# Altium PCB Final_PCB.PcbDoc
Units mil, origin at the board's own origin, x right, y up, seen from the top; angles counter-clockwise.
Board outline 4345 x 3360 mil, 2 copper layers (Top Layer, Bottom Layer); 17 components, 14 nets, 81 pads, 0 vias.
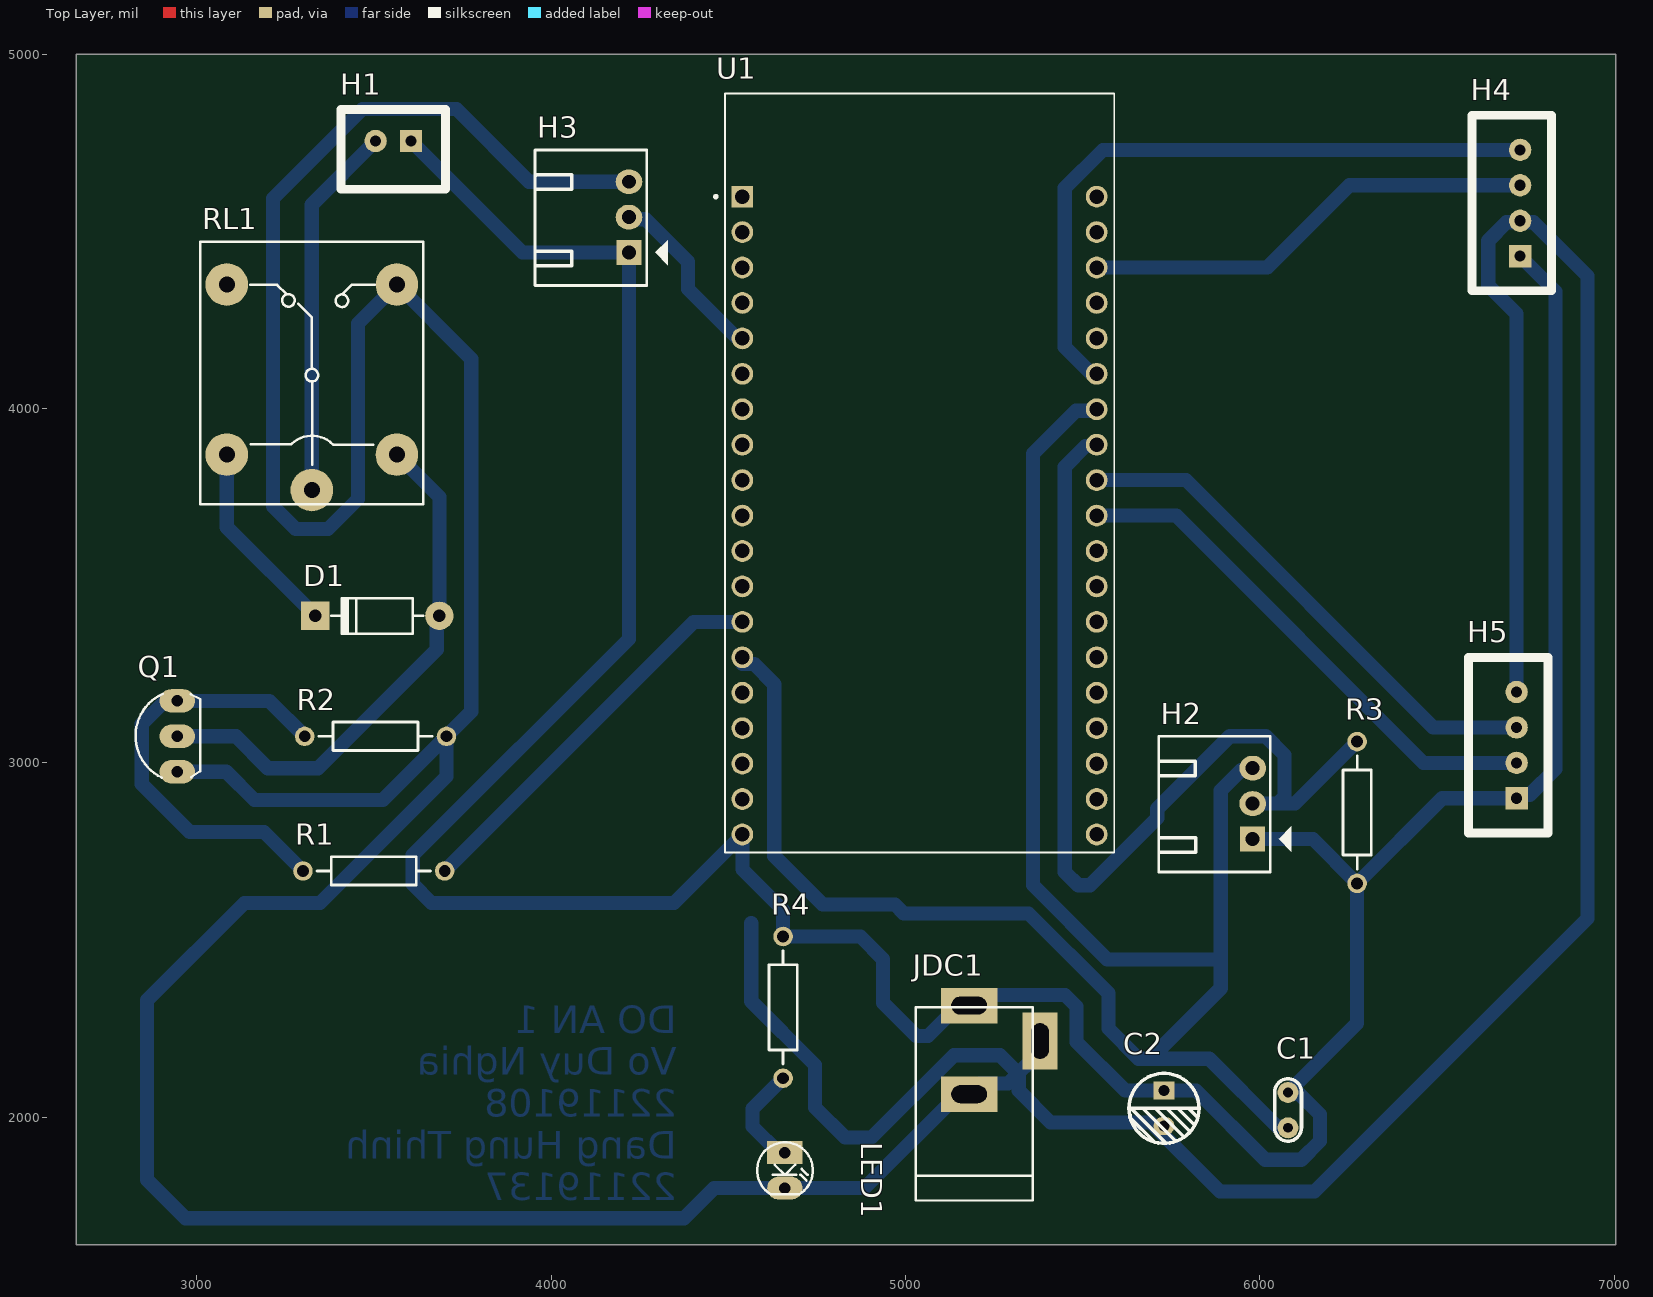
[diagram p0: Top Layer view]
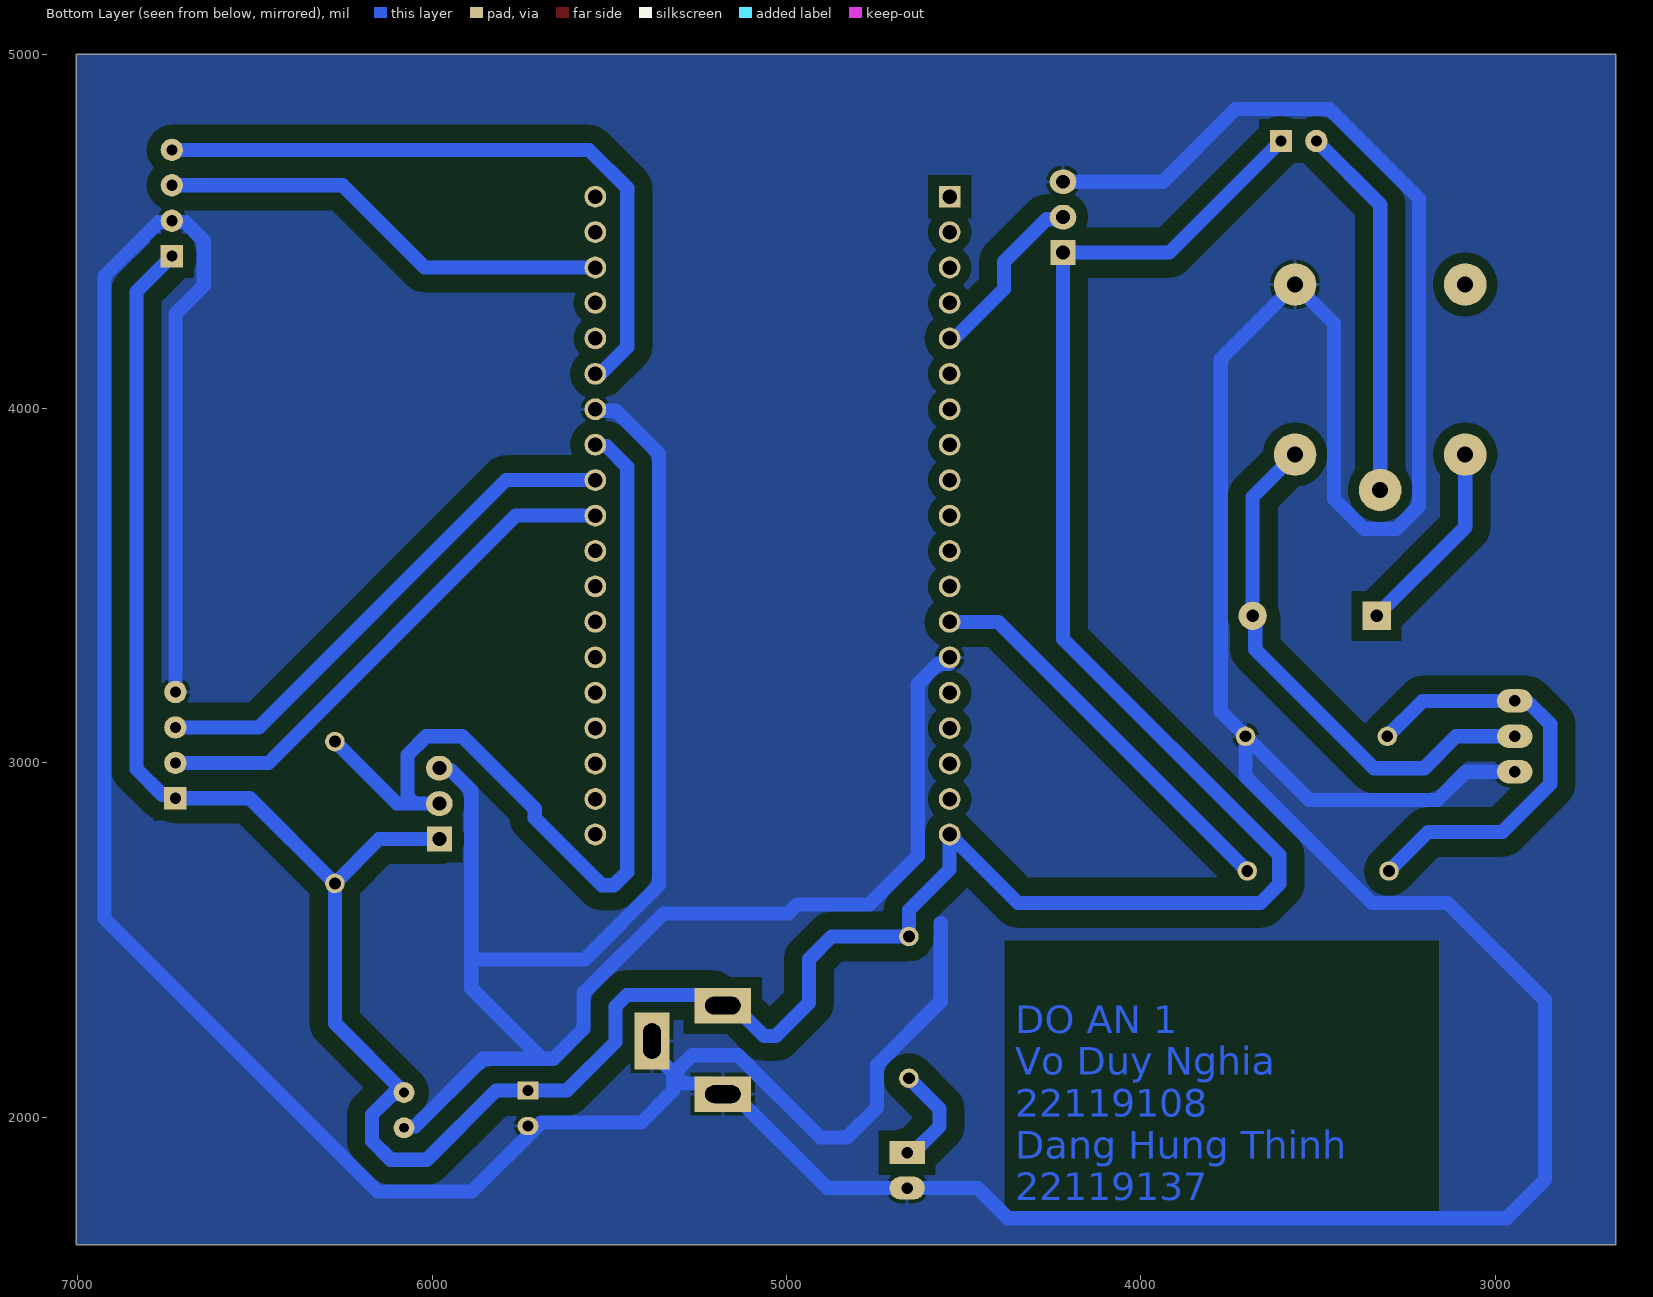
[diagram p1: Bottom Layer view, seen from below]
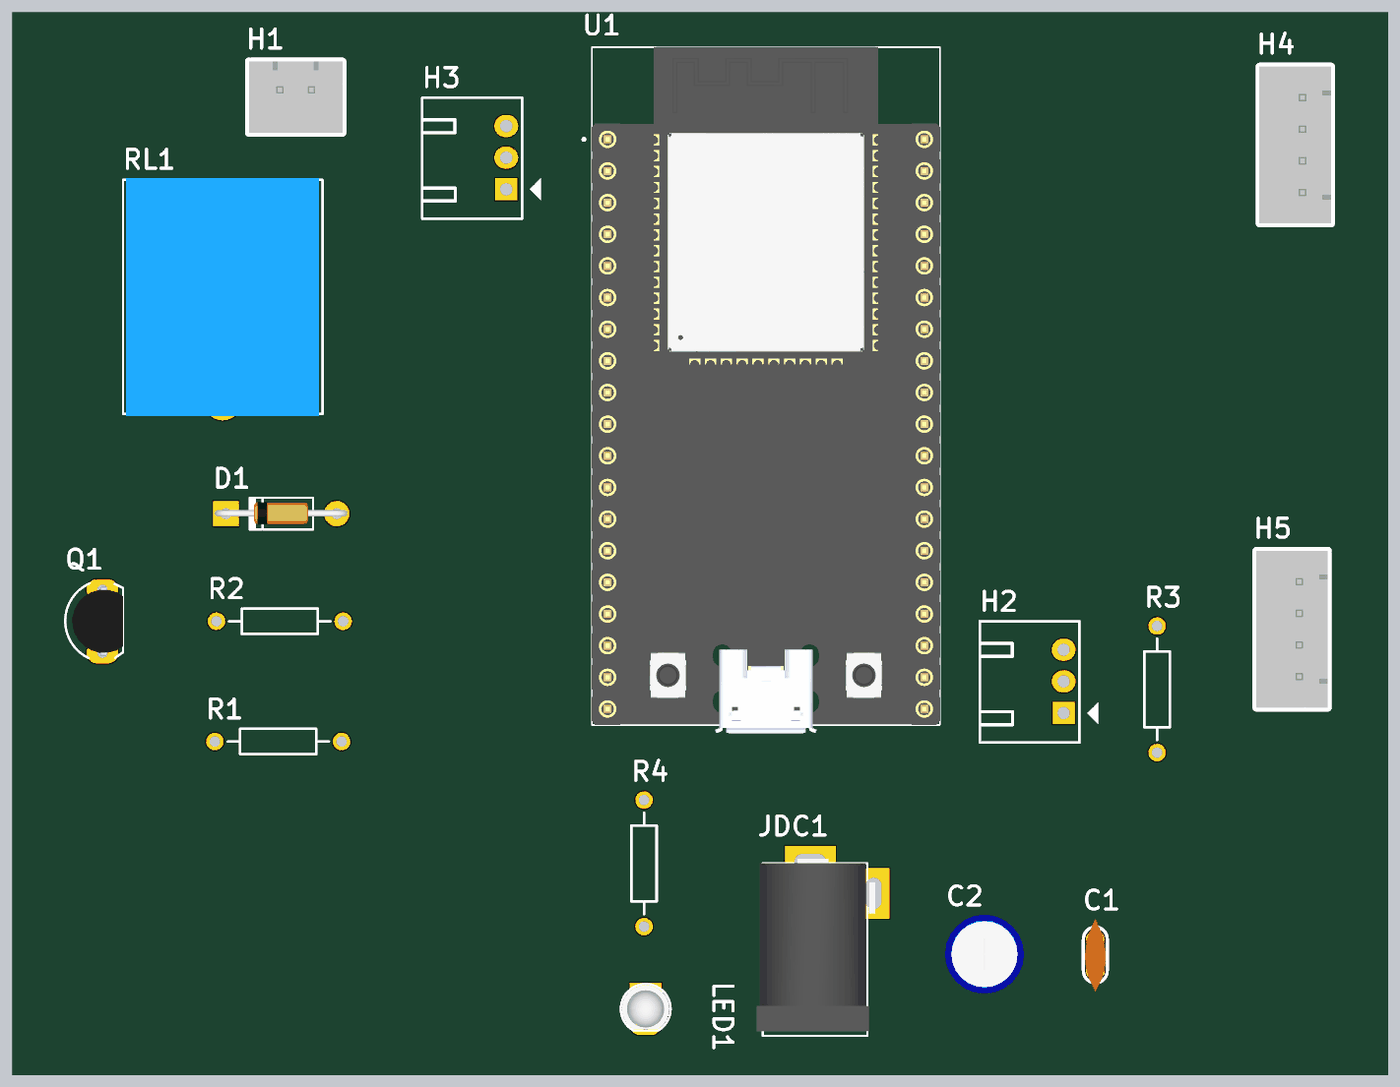
[diagram p2: 3D render of the assembled board from above, using the file's embedded part models]

## Layer stack, top to bottom
Top Solder: solder mask 0.4, Solder Resist, Dk 3.5
Top Layer: signal copper 1.4
Dielectric 1: dielectric 12.6, FR-4, Dk 4.8
Bottom Layer: signal copper 1.4
Bottom Solder: solder mask 0.4, Solder Resist, Dk 3.5

## Board outline
2660,1640 7005,1640 7005,5000 2660,5000

## Design rules (kind name [scope] priority, off if disabled: settings)
Clearance [All] p1: gap=30 ignorepadtopadclearanceinfootprint=FALSE except(40: Fill-Fill Fill-Poly Fill-Region Poly-Poly Poly-Region Region-Region; 50: Arc-Arc Arc-Track Arc-Fill Arc-Poly Arc-Region Track-Track Track-Fill Track-Poly Track-Region)
PolygonConnect [All] p1: connectstyle=Relief reliefconductorwidth=10 reliefentries=4 polygonreliefangle="90 Angle" airgapwidth=10
RoutingLayers [All] p1: top layer_v5=FALSE bottom layer_v5=TRUE
RoutingVias [All] p1: holewidth=28 width=50 viastyle="Through Hole" minholewidth=28 minwidth=50 maxholewidth=28 maxwidth=50
SolderMaskExpansion [All] p1: expansion=4 istentingtop=FALSE
Width [All] p1: maxlimit=40 minlimit=10 preferedwidth=30 toplayer_maxwidth=10 toplayer_prefwidth=10 bottomlayer_minwidth=20 minimp=50.000000 maximp=50.000000 favimp=50.000000
29 further rules are at their usual default settings.

## Classes and differential pairs
component class "So do nguyen ly": C2 D1 H2 H3 H4 JDC1 LED1 Q1 R3 R4 RL1 U1

## Components (designator, comment, footprint, x,y, rotation, side; value= is the part's Value field where it differs from the comment)
C1 "100nF" "tu gom" 6080,2020 r270 top
C2 "100uF" "tu hoa 5mm" 5730,2025 r270 top
D1 "1N4007" D1A 3685,3415 r0 top
H1 "PUMP" XH2.54M-2 3605,4755 r180 top
H2 "DS18B20" "Header 3P DC 2.54" 5980,2785 r180 top
H3 "MDKJZ" "Header 3P DC 2.54" 4220,4440 r180 top
H4 "OLED" XH2.54M-4 6735,4430 r90 top
H5 "SR04" XH2.54M-4 6725,2900 r90 top
JDC1 "Jac DC" DC-IN 5280,2190 r90 top
LED1 "LED" LED-3 4660,1900 r270 top value="LED 3 ly Single Colour"
Q1 "C1815" TO92 2945,3075 r90 top value=C9014
R1 "Res2" AXIAL-0.4 3500,2695 r180 top value=4K7
R2 "Res2" AXIAL-0.4 3505,3075 r180 top value=10K
R3 "Res2" AXIAL-0.4 6275,2860 r270 top value=4K7
R4 "Res2" AXIAL-0.4 4655,2310 r90 top value=1K
RL1 "Relay" RL_SPDT_10A 3325,3770 r90 top value="Relay SPDT, 10A, 12V"
U1 "ESP32-DEVKITC-32D" MODULE_ESP32-DEVKITC-32D 5040,3820 r0 top

## Footprints (in the part's own frame and the unit in brackets; to place one, negate y for a bottom-side part, rotate by r counter-clockwise, add the part's x,y. Pads: shape width x height; smd on the part's side, far side on the other; paste and mask are expansions set on the pad)
AXIAL-0.4 [mm] "Axial Device, Thru-Hole; 2 Leads; 0.4 in Pin Spacing"
  round 1.4 hole 0.85: 1(-5.08,0) 2(5.08,0)
  silkscreen extent -4.06,-1.02 4.06,1.02
D1A [mil] "Diode 1A, W 100mil, L 350mil"
  round 80 hole 35: 1(0,0)
  rect 80x80 hole 35: 2(-350,0)
  silkscreen extent -305,-50 -45,50, body extent -386,-33 34,36, height 84
DC-IN [mil] "Jac DC input"
  rect 100x160 hole 50 slot 100 at 90 deg: 1(125,100) 2(-125,100)
  rect 160x100 hole 50 slot 100 at 0 deg: 3(25,-100)
  silkscreen extent -425,-80 120,250, body extent -410,-105 134,269, height 434
"Header 3P DC 2.54" [mil]
  rect 70x70 hole 39.37: 1(0,0)
  oval 75x70 hole 39.37: 2(0,-100) 3(0,-200)
  silkscreen extent -110,-290 265,93
LED-3 [mil] "LED 2 PIN, 3ly Only colour"
  rect 65x100 hole 32: 1(0,0)
  oval 65x100 hole 32: 2(100,0)
  silkscreen extent -29,-78 118,79, body extent -25,-75 113,75, height 217
MODULE_ESP32-DEVKITC-32D [mm]
  rect 1.56x1.56 / inner round 1.56 / far side rect 1.56x1.56 hole 1.04: J2-1(-12.7,19.76)
  round 1.56 hole 1.04: J2-2(-12.7,17.22) J2-3(-12.7,14.68) J2-4(-12.7,12.14) J2-5(-12.7,9.6) J2-6(-12.7,7.06) J2-7(-12.7,4.52) J2-8(-12.7,1.98) J2-9(-12.7,-0.56) J2-10(-12.7,-3.1) J2-11(-12.7,-5.64) J2-12(-12.7,-8.18) J2-13(-12.7,-10.72) J2-14(-12.7,-13.26) J2-15(-12.7,-15.8) J2-16(-12.7,-18.34) J2-17(-12.7,-20.88) J2-18(-12.7,-23.42) J2-19(-12.7,-25.96) J3-1(12.7,19.76) J3-2(12.7,17.22) J3-3(12.7,14.68) J3-4(12.7,12.14) J3-5(12.7,9.6) J3-6(12.7,7.06) J3-7(12.7,4.52) J3-8(12.7,1.98) J3-9(12.7,-0.56) J3-10(12.7,-3.1) J3-11(12.7,-5.64) J3-12(12.7,-8.18) J3-13(12.7,-10.72) J3-14(12.7,-13.26) J3-15(12.7,-15.8) J3-16(12.7,-18.34) J3-17(12.7,-20.88) J3-18(12.7,-23.42) J3-19(12.7,-25.96)
  silkscreen extent -14.7,-27.25 13.95,27.15, body extent -13.97,-27.9 13.97,27.2, height 6.69
RL_SPDT_10A [mil] "Relay SPDT, 5 pin, 10A,W 650mil, L 800mil, H 800mil"
  round 120 hole 45: 1(0,0) 2(580,240) 3(580,-240) 4(100,-240) 5(100,240)
  silkscreen extent -40,-315 700,315, body extent -46,-304 706,306, height 602
TO92 [mil] "TO-92"
  oval 66x100 hole 32: 1(-100,0) 2(0,0) 3(100,0)
  silkscreen extent -117,-65 120,118, body extent -109,-66 109,95, height 245
"tu gom" [mm] "Tu gom mini"
  round 1.5 hole 0.7: 1(-1.27,0) 2(1.27,0)
  silkscreen extent -2.25,-0.97 2.22,0.97, body extent -2.92,-0.85 2.92,0.85, height 6.12
"tu hoa 5mm" [mm]
  rect 1.3x1.5 hole 0.8: 1(-1.27,0)
  oval 1.3x1.5 hole 0.8: 2(1.27,0)
  silkscreen extent -2.51,-2.51 2.51,2.51, body extent -3.12,-3.18 3.23,3.18, height 14.55
XH2.54M-2 [mm]
  rect 1.6x1.6 hole 0.8: 1(0,0)
  round 1.6 hole 0.8: 2(2.54,0)
  silkscreen extent -2.48,-2.26 5.02,3.46, body extent -2.48,-2.26 5.02,3.48, height 6.91
XH2.54M-4 [mm]
  rect 1.6x1.6 hole 0.8: 1(0,0)
  round 1.6 hole 0.8: 2(2.54,0) 3(5.08,0) 4(7.62,0)
  silkscreen extent -2.48,-2.26 10.1,3.46, body extent -2.48,-2.26 10.1,3.48, height 6.91

## Part data
C1: library part "Tu gom 15pF 50V", "Cắm", Chung_Loai=Cắm, Don_Vi=Con, Ma_Hang=MH004767, So_Chan=2, Ten_Linh_Kien="Tụ gốm 15P 50V"
C2: library part "Tu Hoa 100uF 16V 5x7", "Cắm", Chung_Loai=Cắm, Don_Vi=Con, Ma_Hang=MH001347, So_Chan=2, Ten_Linh_Kien="Tụ Hóa 100uF 16V 5x7MM"
D1: library part D1A, "Diode 1A"
H1: library part "Header 2P 2.54 Duc Thang", "Cắm", Chung_Loai=Cắm, Don_Vi=Con, Ma_Hang=MH001283, Ten_Linh_Kien="Header 2P XH2.54-2P Đực Thẳng"
H2 H3: library part "Header 3P 2.54 Duc Cong", "Cắm", Chung_Loai=Cắm, Don_Vi=Con, Ma_Hang=MH001302, Ten_Linh_Kien="Header 3P XH2.54-3P Đực Cong"
H4 H5: library part "Header 4P 2.54 Duc Thang", "Cắm", Chung_Loai=Cắm, Don_Vi=Con, Ma_Hang=MH001285, Ten_Linh_Kien="Header 4P XH2.54-4P Đực Thẳng"
JDC1: library part DCIN, "Jac DC input"
LED1: "LED Single colour Green and Red"
Q1: "NPN transistor"
R1 R2 R3 R4: "Resistor", LatestRevisionDate=17-Jul-2002, LatestRevisionNote="Re-released for DXP Platform.", PackageDescription="Axial Device, Thru-Hole; 2 Leads; 0.4 in Pin Spacing", PackageReference=AXIAL-0.4, Published=8-Jun-2000, Publisher="Altium Limited"
RL1: library part "Relay 1", "Relay SPDT,10A - 12VDC 5 Pin"
U1: "WiFi Development Tools (802.11) ESP32 General Development Kit, ESP32-WROOM-32D on the board", Package=None, Check_prices=https://www.snapeda.com/parts/ESP32-DEVKITC-32D/Espressif+Systems/view-part/?ref=eda, MF="Espressif Systems", MP=ESP32-DEVKITC-32D, SnapEDA_Link=https://www.snapeda.com/parts/ESP32-DEVKITC-32D/Espressif+Systems/view-part/?ref=snap

## Nets (pads, with @x,y where several pads share a name; then routed paths per layer and width w, separated by ;. In a path a pad name is that pad's centre, name@x,y a point inside that pad or via, vN(x,y) a via of type N, cw(c..) or ccw(c..) an arc to the next point about the centre after c; other vN are vias at no path point)
12: R1.1 U1.J2-13 | length 1131.2
  Bottom Layer w40: R1.1 4402.95,3397.95 U1.J2-13
34: H3.2 U1.J2-5 | length 506.7
  Bottom Layer w40: H3.2 4225.74,4534.26 4266.45,4534.26 4386.51,4414.2 4386.51,4337.3 4521.76,4202.05 4535.9,4202.05 U1.J2-5
+5V: C1.1 C2.1 H1.1 H2.1 H3.1 H4.1 H5.1 JDC1.1 R3.2 R4.2 U1.J2-19 | length 9562.7
  Bottom Layer w40: H1.1 3920,4440 H3.1 4220,3349.58 3610,2739.58 3610,2657.72 3662.72,2605 4347.05,2605 U1.J2-19 4540,2699.56 4655,2584.56 R4.2 4872.99,2510 4937,2445.99 4937,2323 5030.93,2229.07 5064.07,2229.07 5150,2315 JDC1.1 5210,2345 5450.71,2345 5483,2312.71 5483,2212.73 5620.72,2075 C2.1 5820.44,2075 6015.44,1880 6117.28,1880 6170,1932.72 6170,2007.28 6110.93,2066.35 6083.65,2066.35 C1.1 6275,2265 R3.2 ; H2.1 6150,2785 R3.2 ; H4.1 6835,4330 6835,2982.72 6762.28,2910 6735,2910 H5.1 6515,2900 R3.2
DATA: H2.2 R3.1 U1.J3-8 | length 2619
  Bottom Layer w40: U1.J3-8 5535.9,3893.85 5508.62,3893.85 5450,3835.23 5450,2692.28 5487.86,2654.42 5520.99,2654.42 5711.01,2844.44 5711.01,2870.56 5915.44,3075 6017.28,3075 6070,3022.28 6070,2905 6050,2885 ; H2.2 6050,2885 ; R3.1 6100,2885 6070,2885 6050,2885
ECHO: H5.3 U1.J3-9 | length 1474.1
  Bottom Layer w40: U1.J3-9 5791.61,3797.95 6489.56,3100 H5.3
GND: C1.2 C2.2 H2.3 H3.3 H4.2 H5.4 JDC1.2 JDC1.3 LED1.2 Q1.1 R2.1 RL1.3 U1.J2-14 U1.J3-7 | length 22153.6
  Bottom Layer w40: Q1.1 3083.38,2975 3163.38,2895 3525,2895 R2.1 ; H3.3 3938.18,4640 3733.18,4845 3467.72,4845 3215,4592.28 3215,3724.44 3279.44,3660 3370.56,3660 3455,3744.44 3455,4240 RL1.3 3775,4140 3775,3145 R2.1 ; U1.J2-14 4540,3278.66 4573.43,3278.66 4630,3222.09 4630,2736.84 4766.84,2600 4970.36,2600 4995.36,2575 5347.99,2575 5573,2349.99 5573,2250.01 5658,2165 5691.14,2165 ; 4565,2547.28 4565,2327.28 4745,2147.28 4745,2027.6 4830.16,1942.44 4904.72,1942.44 5137.28,2175 5267.28,2175 5317.28,2125 ; 5320,2122.28 5320,2075 5410,1985 5692.72,1985 5887.72,1790 6154.56,1790 6925,2560.44 6925,4373.7 6773.1,4525.6 6740.6,4525.6 6735,4520 6729.4,4525.6 6696.9,4525.6 6645,4473.7 6645,4347.28 6725,4267.28 H5.4 ; JDC1.3 5380,2185 5290,2095 5210,2095 JDC1.2 5150,2065 4885,1800 LED1.2 4460.71,1800 4375.71,1715 2968.43,1715 2860,1823.43 2860,2330 3135,2605 3348.14,2605 3705,2961.86 R2.1 ; U1.J3-7 5535.9,3993.85 5481.34,3993.85 5360,3872.51 5360,2655 5570,2445 5890,2445 ; H2.3 5974.26,2979.26 5946.98,2979.26 5890,2922.28 5890,2445 ; C1.2 6076.35,1973.65 6049.07,1973.65 5857.72,2165 5691.14,2165 ; 5691.14,2165 5890,2363.86 5890,2445
NetD1_1: D1.1 Q1.2 RL1.4 | length 1511.2
  Bottom Layer w40: Q1.2 3110.66,3075 3200.66,2985 3342.28,2985 3677.35,3320.07 3677.35,3407.35 D1.1 3685,3750 RL1.4
NetD1_2: D1.2 RL1.5 | length 558.6
  Bottom Layer w40: RL1.5 3085,3665 D1.2
NetH1_2: H1.2 RL1.1 | length 1059.6
  Bottom Layer w40: RL1.1 3325,4575 H1.2
NetLED1_1: LED1.1 R4.1 | length 293.5
  Bottom Layer w40: R4.1 4569.07,2024.07 4569.07,1973.43 4642.5,1900 LED1.1
NetQ1_3: Q1.3 R1.2 R2.2 | length 1254.1
  Bottom Layer w40: R1.2 3190,2805 2980.62,2805 2845,2940.62 2845,3109.38 2910.62,3175 Q1.3 3205,3175 R2.2
SCL: H4.3 U1.J3-3 | length 1291.1
  Bottom Layer w40: U1.J3-3 6021.26,4397.95 6253.31,4630 H4.3
SDA: H4.4 U1.J3-6 | length 1899.4
  Bottom Layer w40: U1.J3-6 5535.9,4102.05 5521.76,4102.05 5450,4173.81 5450,4622.09 5557.91,4730 H4.4
TRIG: H5.2 U1.J3-10 | length 1474.1
  Bottom Layer w40: U1.J3-10 5764.33,3697.95 6462.28,3000 H5.2
pads on no net: RL1.2 U1.J2-1 U1.J2-2 U1.J2-3 U1.J2-4 U1.J2-6 U1.J2-7 U1.J2-8 U1.J2-9 U1.J2-10 U1.J2-11 U1.J2-12 U1.J2-15 U1.J2-16 U1.J2-17 U1.J2-18 U1.J3-1 U1.J3-2 U1.J3-4 U1.J3-5 U1.J3-11 U1.J3-12 U1.J3-13 U1.J3-14 U1.J3-15 U1.J3-16 U1.J3-17 U1.J3-18 U1.J3-19

## Polygon pours and split planes (outlines as drawn)
GND on Bottom Layer "GND_L02_P000" (solid, remove dead copper, pour order 0): 2660,5000 2660,1640 7005,1640 7005,5000

## Other copper
Bottom Layer:
  text "DO AN 1 / Vo Duy Nghia  / 22119108 / Dang Hung Thinh / 22119137" at 4355,1765 h78.74